# Altium PCB DT-LM.PcbDoc (part 2 of 2)
Units mm, origin at the board's own origin, x right, y up, seen from the top; angles counter-clockwise.
Board outline 100.25 x 53.25 mm, 2 copper layers (Top Layer, Bottom Layer); 126 components, 79 nets, 405 pads, 517 vias.
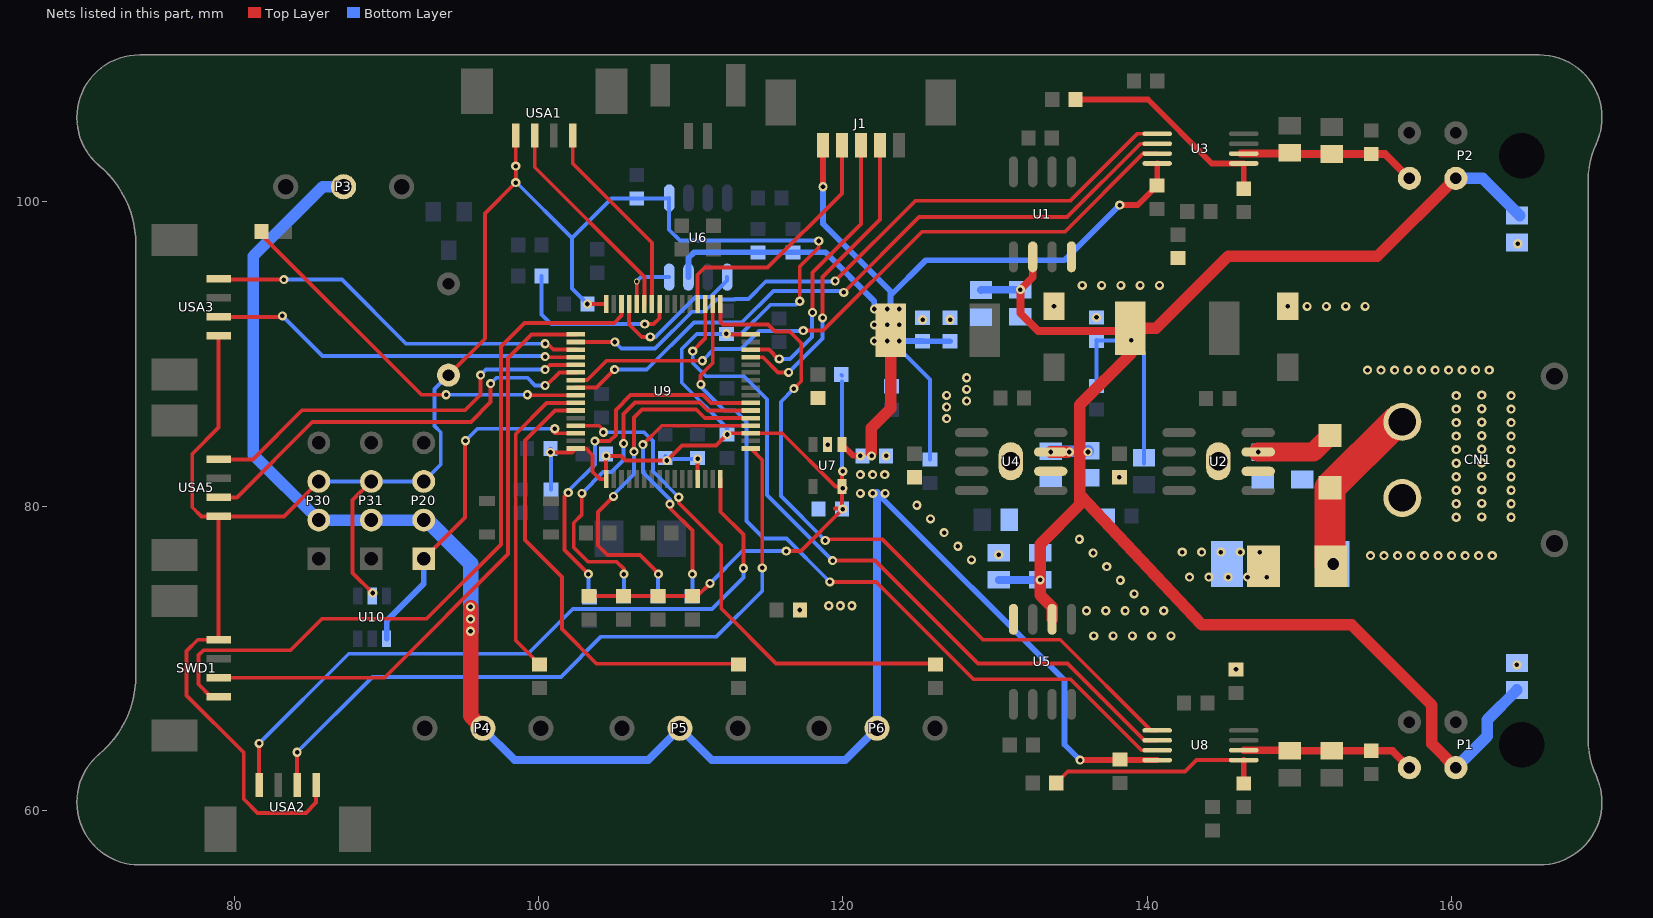
[diagram p2: the nets of this part, all layers, seen from the top]

## Via types
v1: diameter 0.6, hole 0.3, Top Layer to Bottom Layer, 487 vias
v2: diameter 0.5, hole 0.5, Top Layer to Bottom Layer, 24 vias
v3: diameter 5, hole 3.5, Top Layer to Bottom Layer, 4 vias
v4: diameter 0.381, hole 0.254, Top Layer to Bottom Layer, 1 vias
v5: diameter 1.27, hole 0.762, Top Layer to Bottom Layer, 1 vias

## Nets (pads, with @x,y where several pads share a name; then routed paths per layer and width w, separated by ;. In a path a pad name is that pad's centre, name@x,y a point inside that pad or via, vN(x,y) a via of type N, cw(c..) or ccw(c..) an arc to the next point about the centre after c; other vN are vias at no path point) (continued)
PA4: R30.2 U9.20 | length 18.9
  Top Layer w0.254: v1(106.858,84.049) 108.103,85.293 U9.20@113.954,85.294 ; v1(108.636,80.137) 108.636,79.866 110.109,78.393 v1(110.109,75.54)
  Bottom Layer w0.254: v1(106.858,84.049) 106.858,82.22 108.636,80.442 v1(108.636,80.137) ; R30.2@110.076,74.074 110.109,74.108 v1(110.109,75.54)
PA5: R29.2 U9.21 | length 23.9
  Top Layer w0.254: v1(104.927,80.645) 103.911,79.629 103.911,77.402 104.53,76.784 106.68,76.784 107.874,75.59 v1(107.874,75.54) ; v1(106.274,83.591) 106.274,85.827 106.799,86.352 110.363,86.352 110.922,85.793 U9.21@113.954,85.794
  Bottom Layer w0.254: v1(104.927,80.645) 104.877,80.696 106.248,82.067 106.223,82.093 106.274,82.144 v1(106.274,83.591) ; R29.2@107.848,74.057 107.848,75.514 v1(107.874,75.54)
PA6: R32.2 U9.22 | length 25
  Top Layer w0.254: v1(102.845,80.848) 102.845,79.451 102.311,78.918 102.311,77.292 103.251,76.352 105.131,76.352 105.613,75.87 v1@105.613,75.692 ; v1(105.588,84.125) 105.588,86.055 106.35,86.817 110.599,86.817 111.123,86.293 U9.22@113.954,86.294
  Bottom Layer w0.254: v1(102.845,80.848) 104.242,82.245 104.8,82.245 105.588,83.033 v1(105.588,84.125) ; R32.2@105.588,74.074 105.613,74.1 v1(105.613,75.54) v1@105.613,75.692
PA7: R31.2 U9.23 | length 24.8
  Top Layer w0.254: v1(101.956,80.899) 101.702,80.645 101.702,77.114 v1(103.276,75.54) ; v1(103.708,84.277) 104.673,84.277 105.08,84.684 105.08,86.335 106.045,87.3 110.822,87.3 111.328,86.793 U9.23@113.954,86.794
  Bottom Layer w0.254: v1(101.956,80.899) 101.905,80.95 103.708,82.753 v1(103.708,84.277) ; R31.2@103.014,73.998 R31.2@103.353,73.998 103.276,74.074 v1(103.276,75.54)
PA8_BUZZER: R2.2 U9.41 | length 11.6
  Top Layer w0.254: v1(106.985,91.973) 107.569,91.973 107.954,92.358 U9.41@107.954,93.294
  Bottom Layer w0.254: R2.2@100.203,95.123 100.203,92.608 100.838,91.973 v1(106.985,91.973)
PA11_CAN1_RX: U6.4 U9.44 | length 3.7
  Top Layer w0.254: U9.44@106.454,93.294 v4(106.454,94.77)
  Bottom Layer w0.254: v4(106.454,94.77) 106.747,95.063 U6.4@108.585,95.063
PA12_CAN1_TX: U6.1 U9.45 | length 9.9
  Top Layer w0.254: U9.45@105.954,93.294 105.954,91.963 106.782,91.135 v1(107.34,91.135)
  Bottom Layer w0.254: v1(107.34,91.135) 107.696,91.135 110.312,93.751 111.303,93.751 112.395,94.844 U6.1@112.395,95.063
PA15_SPI1_CS: U3.5 U9.50 | length 44.3
  Top Layer w0.254: U9.50@102.454,90.793 v1(105.015,90.793) ; v1(119.494,94.805) 124.765,100.076 134.925,100.076 139.329,104.48 U3.5@140.665,104.48
  Bottom Layer w0.254: v1(105.015,90.793) 105.435,90.373 107.663,90.373 110.076,92.786 110.896,92.786 111.709,93.599 112.878,93.599 112.903,93.624 113.792,93.624 114.935,94.767 v1@119.532,94.767
PB3_SPI1_SCK: U3.7 U9.55 | length 44.3
  Top Layer w0.254: U9.55@102.454,88.294 103.203,88.293 104.47,89.56 v1(110.769,89.56) ; v1(117.399,91.542) 118.694,91.542 125.197,98.044 134.595,98.044 139.731,103.18 U3.7@140.665,103.18
  Bottom Layer w0.254: v1(110.769,89.56) 111.54,90.331 113.313,90.331 114.498,91.516 v1@117.373,91.516
PB4_SPI1_MISO: U3.6 U9.56 | length 44.9
  Top Layer w0.254: U9.56@102.454,87.793 103.821,87.793 v1(105.004,88.976) ; v1(120.066,94.056) 125.019,99.009 134.747,99.009 139.568,103.83 U3.6@140.665,103.83
  Bottom Layer w0.254: v1(105.004,88.976) 107.112,88.976 110.211,92.075 113.36,92.075 115.443,94.158 119.964,94.158 v1(120.066,94.056)
PB5: R18.1 U9.57 | length 25.3
  Top Layer w0.254: R18.1@81.78,98.069 81.78,97.841 92.296,87.325 v1(93.929,87.325) ; v1(99.263,87.325) 99.492,87.325 99.524,87.293 U9.57@102.454,87.294
  Bottom Layer w0.254: v1@93.929,87.249 94.005,87.325 v1(99.263,87.325)
PB6: R19.1 U9.58 | length 20.6
  Top Layer w0.254: R19.1@100.076,69.587 98.5,71.163 98.5,84.759 100.535,86.793 U9.58@102.454,86.794
PB7: R20.1 U9.59 | length 30.1
  Top Layer w0.254: U9.59@102.454,86.294 101.076,86.293 99.111,84.328 99.111,77.775 101.536,75.349 101.536,71.92 103.81,69.647 R20.1@113.157,69.647
PB8: R21.1 U9.61 | length 34
  Top Layer w0.254: U9.61@102.454,85.294 103.987,85.293 104.267,85.014 v1(104.267,84.861) ; v1(109.22,80.594) 109.22,80.206 112.014,77.412 112.014,73.279 115.621,69.672 126,69.672 R21.1@126.086,69.587
  Bottom Layer w0.254: v1(104.267,84.861) 106.934,84.861 107.518,84.277 107.518,82.296 v1(109.22,80.594)
PB9: P20.1 U9.62 U10.1 | length 23.3
  Top Layer w0.254: P20.1@92.126,76.708 92.614,76.708 95.174,79.268 95.174,84.303 v1(95.199,84.303) ; v1@100.969,84.909 101.084,84.793 U9.62@102.454,84.793
  Bottom Layer w0.254: v1(95.199,84.303) 95.993,85.096 v1(101.067,85.096)
  Bottom Layer w0.381: U10.1@90.018,71.292 90.018,72.466 92.456,74.905 92.456,76.331 P20.1@92.675,76.55
PB10: J1.2 U9.29 | length 20.3
  Top Layer w0.254: U9.29@113.954,89.794 114.753,89.793 115.748,88.798 v1(116.434,88.798) ; v1(118.669,92.38) 118.669,95.072 122.447,98.851 J1.2@122.447,103.724
  Bottom Layer w0.254: v1(116.434,88.798) 118.669,91.034 v1(118.669,92.38)
PB11: J1.3 U9.30 | length 18.7
  Top Layer w0.254: U9.30@113.954,90.294 115.142,90.293 v1@115.748,89.687 ; v1(118.008,92.735) 118.008,95.352 121.197,98.54 J1.3@121.197,103.724
  Bottom Layer w0.254: v1(115.824,89.687) 116.535,89.687 117.983,91.135 117.983,92.71 v1(118.008,92.735)
PB12_SPI2_CS: U8.5 U9.33 | length 48.9
  Top Layer w0.254: U9.33@111.954,93.294 111.954,92.121 112.127,91.948 115.087,91.948 115.545,91.491 116.51,91.491 117.272,90.729 117.272,88.214 v1(116.789,87.732) ; v1(118.847,77.749) 118.948,77.749 119.024,77.826 122.606,77.826 129.21,71.222 134.29,71.222 140.249,65.263 U8.5@140.665,65.263
  Bottom Layer w0.254: v1(116.789,87.732) 115.926,86.869 115.926,80.67 v1(118.847,77.749)
PB13_SPI2_SCK: U8.7 U9.34 | length 49.6
  Top Layer w0.254: v1(110.668,88.011) 110.655,88.024 110.655,88.608 111.454,89.407 U9.34@111.454,93.294 ; v1@118.948,75.032 122.199,75.032 128.6,68.631 134.976,68.631 139.644,63.963 U8.7@140.665,63.963
  Bottom Layer w0.254: v1(110.668,88.011) 110.668,87.833 112.217,86.284 112.928,86.284 113.665,85.547 113.665,79.019 114.808,77.876 116.307,77.876 118.948,75.235 v1@118.948,75.032
  other v1: 119.151,75.032
PB14_SPI2_MISO: U8.6 U9.35 | length 48.8
  Top Layer w0.254: v1(110.134,90.195) 110.954,91.015 U9.35@110.954,93.294 ; v1@119.329,76.276 119.482,76.429 122.123,76.429 128.88,69.672 134.772,69.672 139.832,64.613 U8.6@140.665,64.613
  Bottom Layer w0.254: v1(110.134,90.195) 110.134,89.408 110.998,88.544 113.513,88.544 115.025,87.032 115.025,80.733 v1(119.329,76.429)
PB15: J1.4 U9.36 | length 16.8
  Top Layer w0.254: U9.36@110.454,93.294 110.454,95.214 110.922,95.682 115.062,95.682 119.947,100.567 J1.4@119.947,103.724
PGND: C1.2 C2.1 C3.1 C8.1 C9.1 C10.1 C11.1 C15.1 C16.1 C17.1 C18.1 C19.1 C20.1 C28.1 C29.1 C_QA1.1 C_QA2.1 CN1.1 D1.1 D2.K D3.1 D4.K D5.K R7.1 R12.1 R23.2 R26.2 R27.2 T1.1 U1.4 U2.6 U2.9 U4.6 U4.9 U5.4 U7.2
  other v1: 145.847,69.274 164.313,69.572 136.495,71.476 137.765,71.476 139.035,71.476 140.305,71.476 141.575,71.476 136.017,73.127 137.287,73.127 138.557,73.127 139.827,73.127 141.097,73.127 117.178,73.177 119.075,73.457 119.837,73.457 120.599,73.457 139.144,74.233 138.246,75.132 142.791,75.337 144.061,75.337 145.331,75.337 146.601,75.337 147.871,75.337 137.348,76.03 128.459,76.472 154.686,76.759 155.575,76.759 156.464,76.759 157.353,76.759 158.242,76.759 159.131,76.759 160.02,76.759 160.909,76.759 161.798,76.759 162.687,76.759 130.251,76.811 136.45,76.928 142.313,76.988 143.583,76.988 144.853,76.988 146.123,76.988 147.393,76.988 127.56,77.37 135.552,77.826 126.662,78.268 125.764,79.166 160.325,79.273 163.932,79.273 162.001,79.299 124.866,80.064 160.325,80.162 163.932,80.162 162.001,80.188 160.325,81.051 163.932,81.051 162.001,81.077 138.176,81.907 160.325,81.94 163.932,81.94 162.001,81.966 160.325,82.829 163.932,82.829 162.001,82.855 122.842,83.312 160.325,83.718 163.932,83.718 162.001,83.744 118.999,84.052 160.325,84.607 163.932,84.607 162.001,84.633 160.325,85.496 163.932,85.496 162.001,85.522 126.822,85.761 160.325,86.385 163.932,86.385 162.001,86.411 126.822,86.523 128.143,86.919 126.822,87.285 160.325,87.274 163.932,87.274 162.001,87.3 128.143,87.681 128.143,88.443 154.489,88.951 155.378,88.951 156.267,88.951 157.156,88.951 158.045,88.951 158.934,88.951 159.823,88.951 160.712,88.951 161.601,88.951 162.49,88.951 125.247,92.261 127.051,92.261 136.677,92.413 133.883,93.135 149.25,93.135 150.52,93.135 151.79,93.135 153.06,93.135 154.33,93.135 135.738,94.519 137.008,94.519 138.278,94.519 139.548,94.519 140.818,94.519 164.363,97.257
QA1: C12.2 C13.2 P2.2 R8.2 U3.2 | length 11.7
  Top Layer w0.508: U3.2@146.177,103.18 149.2,103.18 149.454,103.149 C12.2@152.146,103.149 R8.2@154.737,103.149 155.645,103.149 P2.2@157.247,101.548
QA2: C31.2 C32.2 P1.2 R16.2 U8.2 | length 11.4
  Top Layer w0.508: U8.2@146.355,63.963 149.118,63.963 149.149,63.932 151.79,63.932 154.381,63.932 156.128,63.932 P1.2@157.247,62.813
SWCLK@PA14: SWD1.2 U9.49 | length 40.4
  Top Layer w0.254: SWD1.2@78.973,68.722 89.854,68.722 97.993,76.86 97.993,89.738 99.548,91.293 U9.49@102.454,91.293
SWDIO@PA13: SWD1.1 U9.46 | length 49
  Top Layer w0.254: SWD1.1@78.973,67.472 78.477,67.472 77.648,68.301 77.648,70.215 77.969,70.536 83.693,70.536 85.763,72.606 92.647,72.606 97.536,77.495 97.536,90.511 99.075,92.05 104.978,92.05 105.454,92.525 U9.46@105.454,93.294
U1_RX@PA10: U9.43 USA1.2 | length 14.1
  Top Layer w0.254: USA1.2@99.75,104.368 99.75,102.282 106.954,95.078 U9.43@106.954,93.294
U1_TX@PA9: U9.42 USA1.4 | length 13.2
  Top Layer w0.254: USA1.4@102.25,104.368 102.25,102.525 107.454,97.321 U9.42@107.454,93.294
U2_RX@PA3: U9.17 USA2.2 | length 46.7
  Top Layer w0.254: USA2.2@84.13,61.798 v1(84.13,63.825) ; U9.17@113.954,83.794 114.706,83.041 v1(114.706,75.946)
  Bottom Layer w0.254: v1(84.13,63.825) 89.089,68.783 101.473,68.783 104.115,71.425 111.709,71.425 114.706,74.422 v1(114.706,75.946)
U2_TX@PA2: U9.16 USA2.4 | length 46.1
  Top Layer w0.254: USA2.4@81.63,61.798 v1(81.63,64.409) ; U9.16@111.954,81.794 111.954,79.638 113.462,78.13 v1(113.462,75.921)
  Bottom Layer w0.254: v1(81.63,64.409) 87.528,70.307 99.301,70.307 102.248,73.254 111.404,73.254 113.462,75.311 v1(113.462,75.921)
U3_RX@PC11: U9.52 USA3.2 | length 24.6
  Top Layer w0.254: USA3.2@78.973,92.446 83.099,92.446 v1(83.16,92.507) ; v1(100.432,89.84) 100.478,89.793 U9.52@102.454,89.794
  Bottom Layer w0.254: v1(83.16,92.507) 85.801,89.865 100.406,89.865 v1(100.432,89.84)
U3_TX@PC10: U9.51 USA3.4 | length 25.3
  Top Layer w0.254: USA3.4@78.973,94.946 79.025,94.894 v1(83.261,94.894) ; v1@100.584,90.678 100.969,90.293 U9.51@102.454,90.294
  Bottom Layer w0.254: v1(83.261,94.894) 87.071,94.894 91.288,90.678 v1(100.432,90.678)
U5_RX@PD2: U9.54 USA5.2 | length 27.9
  Top Layer w0.254: USA5.2@78.973,80.584 80.167,80.584 85.129,85.546 95.554,85.546 96.85,86.843 v1(96.85,88.062) ; v1@100.508,87.935 101.366,88.793 U9.54@102.454,88.794
  Bottom Layer w0.254: v1(96.85,88.062) 97.231,88.443 99.263,88.443 99.771,87.935 v1(100.432,87.935)
U5_TX@PC12: U9.53 USA5.4 | length 26.8
  Top Layer w0.254: USA5.4@78.973,83.084 81.23,83.084 84.455,86.309 95.174,86.309 96.19,87.325 v1(96.19,88.618) ; v1(100.432,88.976) 100.749,89.293 U9.53@102.454,89.294
  Bottom Layer w0.254: v1(96.19,88.618) 96.548,88.976 v1(100.432,88.976)
VCC: C1.1 CN1.2 S1.1 T1.2 | length 11.3
  Top Layer w2.032: T1.2@152.07,76.048 152.019,76.098 S1.1@152.019,81.216 CN1.2@156.349,85.546
  other v5: 152.248,76.2
VCC_3.3V: BEEP1.2 C29.2 C30.2 C35.1 C36.1 C37.1 C38.1 C39.1 C40.2 C41.2 D10.A D11.A D12.A D13.A P20.3 P30.3 P31.3 R15.2 R28.1 SWD1.4 U6.5 U7.5 U9.1 U9.13 U9.19 U9.32 U9.48 U9.64 U10.5 USA1.1 USA2.1 USA3.1 USA5.1 | length 204.1
  Top Layer w0.254: USA3.1@78.973,91.196 78.973,85.171 77.241,83.439 77.241,79.934 77.841,79.334 USA5.1@78.973,79.334 ; USA2.1@85.38,61.798 85.38,60.514 84.709,59.842 81.534,59.842 80.62,60.757 80.62,63.805 76.86,67.564 76.86,70.485 77.597,71.222 SWD1.4@78.973,71.222 USA5.1@78.973,79.334 ; P30.3@85.555,81.63 83.259,79.334 USA5.1@78.973,79.334 ; P31.3@89.006,81.63 87.782,80.407 87.782,75.616 v1(89.103,74.295) ; BEEP1.2@94.082,88.618 96.469,91.005 96.469,99.238 v1(98.501,101.27) v1(98.501,102.362) 98.501,104.367 USA1.1@98.5,104.368 ; v1@100.736,83.744 100.787,83.693 v1(100.787,83.542) 102.203,83.542 U9.64@102.454,83.794 ; U9.64@102.454,83.794 103.117,83.794 103.558,83.354 103.558,82.271 104.035,81.793 U9.1@104.454,81.794 104.445,81.803 v1(104.445,83.312) 105.41,83.312 105.715,83.007 v1(108.433,83.007) 109.423,83.998 111.676,83.998 v1(112.395,84.717) 112.471,84.793 116.019,84.793 119.51,81.302 U7.5@119.949,81.302 ; v1(103.208,93.294) U9.48@104.453,93.294 ; D12.A@103.327,74.092 D13.A@105.588,74.092 D10.A@107.848,74.092 D11.A@110.109,74.092 110.431,74.092 v1(111.269,74.93) ; U9.13@110.454,81.794 v1(110.454,83.109) ; v1(112.344,91.338) 112.389,91.293 U9.32@113.954,91.293 ; v1(116.281,77.055) 117.248,77.055 v1(120,79.807) ; v1(117.17,93.472) 117.17,95.75 118.415,96.995 v1(118.415,97.434) ; 119.482,79.858 119.949,79.858 U7.5@119.949,81.178 ; U7.5@119.947,81.304 v1@119.947,82.296
  Bottom Layer w0.254: P30.3@85.555,81.63 P31.3@89.006,81.63 P20.3@92.456,81.63 ; P20.3@92.675,81.63 P20.3@92.456,81.63 ; BEEP1.2@94.082,88.618 93.167,87.703 93.167,85.268 93.574,84.861 93.574,82.748 P20.3@92.456,81.63 ; v1(98.501,102.362) 98.501,101.33 102.202,97.63 ; v1(100.787,83.542) 100.787,83.742 100.813,83.767 R28.1@100.813,81.11 ; v1(103.208,93.294) 102.202,94.301 102.202,97.63 ; C40.2@108.331,83.312 108.534,83.109 v1(110.454,83.109) ; v1(111.269,74.93) 113.394,77.055 v1(116.281,77.055) ; v1(112.395,84.717) 112.395,85.141 109.415,88.121 109.415,90.331 110.398,91.313 C37.1@112.344,91.313 113.309,91.313 115.24,93.243 116.942,93.243 v1(117.17,93.472) ; v1(118.415,97.434) 118.389,97.46 109.296,97.46 108.585,98.171 U6.5@108.585,100.263 108.552,100.23 C30.2@106.454,100.23 104.802,100.23 102.202,97.63 ; R15.2@119.896,88.646 R15.2@119.949,88.593 ; v1@119.947,82.296 119.949,82.298 R15.2@119.949,88.212
  other v1: 120,81.178 120,82.296
VCC_5V: C7.2 C17.2 C18.2 C24.1 C25.1 C26.2 C28.2 J1.5 L2.1 P3.2 P4.2 P5.2 P6.2 P20.2 P30.2 P31.2 R9.2 R10.2 U3.8 U6.3 U7.1 U8.8 | length 198.8
  Top Layer w0.381: v1@118.697,101.048 J1.5@118.697,103.724 ; U7.1@119.949,84.052 120.689,83.312 v1(121.152,83.312) v1@121.279,83.312 ; v1(135.595,63.313) C26.2@138.092,63.313 ; C26.2@138.074,63.33 C26.2@138.092,63.313 ; v1(138.201,99.797) 139.387,99.797 C7.2@140.665,101.075 U3.8@140.665,102.53 ; C26.2@138.227,63.356 C26.2@138.184,63.313 ; U8.8@140.665,63.313 C26.2@138.184,63.313 ; C26.2@138.092,63.313 C26.2@138.184,63.313
  Top Layer w0.762: v1@121.869,83.515 121.869,85.141 123.152,86.423 L2.1@123.152,91.567
  Top Layer w1.016: v1@95.529,73.317 v1(95.529,72.581) v1(95.529,71.78) 95.529,66.217 P4.2@96.342,65.404
  Bottom Layer w0.254: 124,90.06 125.73,88.33 R9.2@125.73,83.066
  Bottom Layer w0.381: U6.3@109.855,95.063 109.855,96.317 110.228,96.69 C24.1@114.427,96.69 C25.1@116.713,96.69 118.855,96.69 122.072,93.472 v1(122.072,92.964) ; v1(118.697,101) 118.697,98.574 123.139,94.132 123.139,93.853 ; v1@122.25,80.874 134.569,68.555 134.569,64.338 v1(135.595,63.313) ; v1@123.139,92.913 123.139,93.853 ; R10.2@123.19,87.884 123.114,87.96 123.114,90.861 v1(123.698,90.861) 125.235,90.861 125.247,90.873 125.273,90.848 C18.2@127.051,90.848 ; v1(138.201,99.797) 134.569,96.164 125.451,96.164 123.139,93.853
  Bottom Layer w0.508: P4.2@96.342,65.404 98.424,63.322 107.214,63.322 P5.2@109.296,65.404 111.378,63.322 120.168,63.322 P6.2@122.25,65.404 v1@122.25,80.874
  Bottom Layer w0.762: P3.2@87.19,101 85.811,101 81.255,96.444 81.255,83.391 P30.2@85.555,79.09 P31.2@89.006,79.09 P20.2@92.456,79.09 P20.2@92.675,79.09
  Bottom Layer w1.016: P20.2@92.675,79.09 95.529,76.236 v1(95.529,73.381) v1(95.529,72.581) v1(95.529,71.78)
  other v1: 121.152,80.848 121.968,80.848 122.784,80.848 121.152,82.08 121.955,82.08 122.758,82.08 121.895,83.312 122.072,90.861 122.911,90.861 122.072,91.923 122.911,91.923 123.698,91.923 122.911,92.964 123.698,92.964
VCC_12V: C2.2 C3.2 C10.2 C11.2 C15.2 C16.2 C19.2 C20.2 C_QA1.2 C_QA2.2 L1.1 P1.1 P2.1 R4.2 R5.2 U1.2 U4.7 U5.2 | length 127
  Top Layer w0.508: U1.2@132.486,96.393 132.486,95.048 v1(131.674,94.235) 131.674,92.685 132.842,91.516 138.722,91.516 L1.1@138.9,91.694
  Top Layer w0.762: v1(133.664,83.566) v1@134.772,83.566 ; U5.2@133.756,72.568 133.756,73.355 132.969,74.143 v1(132.969,75.158) 132.969,77.495 135.585,80.112 135.585,80.747 ; 135.585,83.846 135.585,80.747 ; 135.585,83.998 135.585,86.665 138.963,90.043 138.963,90.564 L1.1@138.367,91.161 ; L1.1@138.9,91.694 140.589,91.694 145.339,96.444 155.143,96.444 160.247,101.548 P2.1@160.297,101.548 ; P1.1@160.297,62.813 158.725,64.386 158.725,66.929 153.441,72.212 143.583,72.212 135.612,80.72 135.585,80.747
  Bottom Layer w0.254: R5.2@136.677,88.121 C10.2@136.677,90.873 ; C10.2@136.677,90.924 136.703,90.899 v1(138.963,90.899) 139.802,90.06 R4.2@139.802,82.812
  Bottom Layer w0.508: C3.2@129.083,94.21 129.108,94.235 v1(131.674,94.235) ; C19.2@130.251,75.158 v1(132.969,75.158)
  Bottom Layer w0.762: C16.2@133.664,83.618 136.119,83.618 C15.2@136.144,83.643 ; P1.1@160.297,62.813 162.357,64.872 162.357,65.963 C_QA2.2@164.313,67.919 ; P2.1@160.297,101.548 162.054,101.548 C_QA1.2@164.49,99.112
  other v1: 134.891,83.566 136.119,83.566
VCC_24V: C8.2 C9.2 S1.2 U2.7 | length 7.8
  Top Layer w1.27: v1(147.305,83.566) 150.939,83.566 S1.2@152.019,84.645
  Bottom Layer w0.508: C8.2@147.599,83.542 C9.2@150.19,83.542
VREF_5V_QA1: C6.2 R1.1 U3.1 | length 14.4
  Top Layer w0.381: R1.1@135.306,106.731 140.056,106.731 144.256,102.53 U3.1@146.355,102.53 C6.2@146.355,100.871
VREF_5V_QA2: C23.2 R11.2 U8.1 | length 14.5
  Top Layer w0.254: R11.2@134.026,61.798 134.788,62.56 142.494,62.56 143.246,63.313 U8.1@146.355,63.313
  Top Layer w0.381: C23.2@146.355,61.781 U8.1@146.355,63.313
pads on no net: CN1.3 CN1.4 CN2.3 CN2.4 J1.0 P1. P1.4 P2. P2.4 SW1.2 SW1.3 U1.1 U1.3 U1.5 U1.7 U1.8 U2.2 U2.3 U2.5 U4.2 U4.3 U4.5 U5.1 U5.3 U5.5 U5.7 U5.8 U7.3 U7.4 U9.2 U9.3 U9.4 U9.8 U9.9 U9.10 U9.11 U9.24 U9.25 U9.26 U9.27 U9.37 U9.38 U9.39 U9.40 U10.4
copper on no net:
  other v1: 73.776,60.546 73.776,105.546
  other v2: 73.776,58.438 71.998,59.276 75.554,59.276 71.871,61.308 75.681,61.308 73.776,62.654 158.776,70.938 156.998,71.776 160.554,71.776 156.871,73.808 160.681,73.808 158.776,75.154 158.776,90.938 156.998,91.776 160.554,91.776 156.871,93.808 160.681,93.808 158.776,95.154 73.776,103.438 71.998,104.276 75.554,104.276 71.871,106.308 75.681,106.308 73.776,107.654
  other v3: 73.776,60.546 158.776,73.046 158.776,93.046 73.776,105.546

## Polygon pours and split planes (outlines as drawn)
PGND on Top Layer "Top Layer-PGND" (solid, remove dead copper, pour order 36): 167.973,68.989 129.042,68.989 125.451,72.581 116.831,72.581 116.831,89.641 121.285,94.095 121.285,97.307 121.895,97.917 136.576,97.917 137.744,96.749 143.383,96.749 144.78,95.352 159.106,95.352 161.62,97.866 167.973,97.866
DGND on Top Layer "Top Layer-DGND" (solid, remove dead copper, pour order 26): 128.194,68.496 142.511,68.496 142.511,66.404 135.941,66.404 135.941,58.725 128.194,58.725
DGND on Top Layer "Top Layer-DGND 1" (solid, remove dead copper, pour order 22): 74.524,58.725 128.194,58.725 128.194,71.857 116.357,71.857 116.357,95.631 125.12,95.631 125.12,103.251 139.446,103.251 139.446,108.991 127.838,108.991 127.838,106.604 105.181,106.604 94.412,106.604 94.412,103.175 74.524,103.175
AGND_QA2 on Top Layer "Top Layer-AGND_QA2" (solid, remove dead copper, pour order 14): 137.008,62.549 137.008,57.277 147.345,57.277 147.345,62.527
AGND_QA2 on Top Layer "AGND_QA2_L01_P012" (solid, remove dead copper, pour order 12): 143.485,68.301 143.485,57.277 161.95,57.277 161.95,68.301
AGND_QA1 on Top Layer "AGND_QA1_L01_P006" (solid, remove dead copper, pour order 6): 140.538,108.966 140.538,105.232 161.646,105.232 161.646,108.966
AGND_QA1 on Top Layer "AGND_QA1_L01_P002" (solid, remove dead copper, pour order 2): 139.141,97.358 148.209,97.358 148.209,99.746 156.261,99.746 161.646,99.746 161.646,105.969 141.884,105.969 139.141,105.969
no net on Top Layer "Top Layer-No Net 1" (solid, remove dead copper, pour order 24): 128.041,65.291
no net on Top Layer "Top Layer-No Net 2" (solid, remove dead copper, pour order 10): 143.332,68.25
no net on Top Layer "Top Layer-No Net 3" (solid, remove dead copper, pour order 4): 139.921,109.169
no net on Top Layer "Top Layer-No Net" (solid, remove dead copper, pour order 0): 120.625,84.176
PGND on Bottom Layer "Bottom Layer-PGND" (solid, remove dead copper, pour order 38): 167.818,69.07 129.244,69.07 125.653,72.661 117.033,72.661 116.792,72.902 116.792,89.48 121.487,94.176 121.487,97.388 122.097,97.997 136.778,97.997 137.946,96.829 143.585,96.829 144.982,95.432 159.308,95.432 161.822,97.947 167.818,97.947
DGND on Bottom Layer "Bottom Layer-DGND" (solid, remove dead copper, pour order 34): 128.194,68.496 142.511,68.496 142.511,66.192 136.246,66.192 136.246,58.725 128.194,58.725
DGND on Bottom Layer "Bottom Layer-DGND 1" (solid, remove dead copper, pour order 30): 74.447,58.718 128.169,58.718 128.169,71.85 116.333,71.85 116.333,95.624 125.096,95.624 125.096,103.244 139.549,103.244 139.549,108.984 127.814,108.984 127.814,106.597 105.157,106.597 94.387,106.597 94.387,103.168 74.447,103.168
AGND_QA2 on Bottom Layer "Bottom Layer-AGND_QA2" (solid, remove dead copper, pour order 20): 137.185,62.549 137.185,57.277 143.713,57.277 143.713,62.535
AGND_QA2 on Bottom Layer "AGND_QA2_L02_P018" (solid, remove dead copper, pour order 18): 143.231,68.351 143.231,57.277 161.95,57.277 161.95,68.351
AGND_QA1 on Bottom Layer "AGND_QA1_L02_P008" (solid, remove dead copper, pour order 8): 139.852,107.366 139.852,97.511 155.981,97.511 155.981,107.366

## Other copper
Top Layer:
  rectangle net AGND_QA1: 140.941,97.307 143.18,98.882
  rectangle net VCC_5V: 121.463,79.68 123.393,82.55
  rectangle net VCC_3.3V: 119.405,79.268 120.498,82.601
  rectangle net VCC_5V: 120.752,79.68 122.25,84.277
  rectangle net VCC_5V: 121.666,89.713 124.206,93.37
  rectangle net VCC_12V: 135.103,79.654 136.982,84.793
  rectangle net VCC_12V: 133.121,82.88 136.804,84.277
  pour cut-out: 139.167,104.826 139.167,100.465 142.186,100.465 142.186,104.818
Bottom Layer:
  rectangle net VCC_5V: 121.564,79.807 123.342,82.372
  rectangle net VCC_3.3V: 119.431,79.273 120.523,82.575
  rectangle net VCC_5V: 120.752,79.731 122.123,84.277
  rectangle net VCC_5V: 121.641,89.764 124.231,94.77
  rectangle net VCC_12V: 133.096,82.753 136.779,84.684
  pour cut-out: 139.141,107.421 139.141,102.862 142.16,102.862 142.16,107.413
  pour cut-out: 139.167,104.826 139.167,100.465 142.186,100.465 142.186,104.818
  pour cut-out: 157.709,97.307
  pour cut-out: 155.981,97.511 148.234,97.511 148.234,99.797 155.981,99.797

## Silkscreen, mask and mechanical layers (free items; w line width, h text height)
Top Overlay:
  lines w0.254: 88.036,87.706 88.595,86.919 ; 88.595,87.02 88.595,87.528 ; 88.595,92.431 88.595,86.919 ; 89.154,87.706 88.595,86.919 ; 118.161,100.076 119.939,102.718 ; 121.209,100.895 121.209,102.794 ; 122.504,102.692 124.282,100.051
  text "L  H" at 107.994,99.695 h3.05
  text "USA1" at 96.996,98.984 h3.05
  text "PB11" at 119.05,98.755 h1.52
  text "PB15" at 114.986,98.069 h1.52
  text "PB10" at 121.514,97.942 h1.52
  text "USA3" at 80.975,96.45 h3.05 r270
  text "PB5" at 84.567,95.58 h3.05
  text "QA1" at 161.925,93.294 h3.81
  text "GND" at 83.804,90.663 h2.03
  text "3.3V" at 115.926,90.119 h3.05
  text "3.3V" at 83.804,88.626 h2.03
  text "5V" at 83.804,86.589 h2.03
  text "5V" at 122.929,85.077 h3.05
  text "12V" at 136.284,84.963 h3.05
  text "USA5" at 80.975,84.588 h3.05 r270
  text "PA0" at 84.104,72.826 h1.78
  text "PA1" at 87.832,72.826 h1.78
  text "PB9" at 91.096,72.826 h1.78
  text "SWD" at 81.331,72.329 h3.05 r270
  text "QA2" at 161.925,70.917 h3.81
  text "PB6" at 93.719,68.194 h3.05
  text "PB7" at 106.673,68.194 h3.05
  text "PB8" at 119.627,68.194 h3.05
  text "USA2" at 80.126,63.373 h3.05
Mechanical 1:
  lines w0.254: 73.776,109.546 ccw(c73.776,105.546) 69.776,105.546 ccw(c73.776,105.546) 71.205,102.482 cw(c66.789,97.219) 73.659,97.219 73.659,68.873 cw(c66.789,68.873) 71.205,63.61 ccw(c73.776,60.546) 69.776,60.546 ccw(c73.776,60.546) 73.776,56.546 165.776,56.546 ccw(c165.776,60.546) 169.402,62.237 cw(c174.501,64.614) 168.874,64.614 168.874,101.478 cw(c174.501,101.478) 169.402,103.856 ccw(c165.776,105.546) 165.776,109.546 73.859,109.546

## Text inside footprints (layer, text, board x,y; h text height)
BEEP1: Top Overlay "+" at 93.294,88.494 h3.05 r90